# Altium PCB board.PcbDoc
Units mil, origin at the board's own origin, x right, y up, seen from the top; angles counter-clockwise.
Board outline 8000 x 8000 mil, 4 copper layers (LV, SIGPour, VOLTPour, HV), stack 23.756 mil thick; 121 components, 25 nets, 193 pads, 72 vias.
Unrouted connection lines stored in the file: 122.
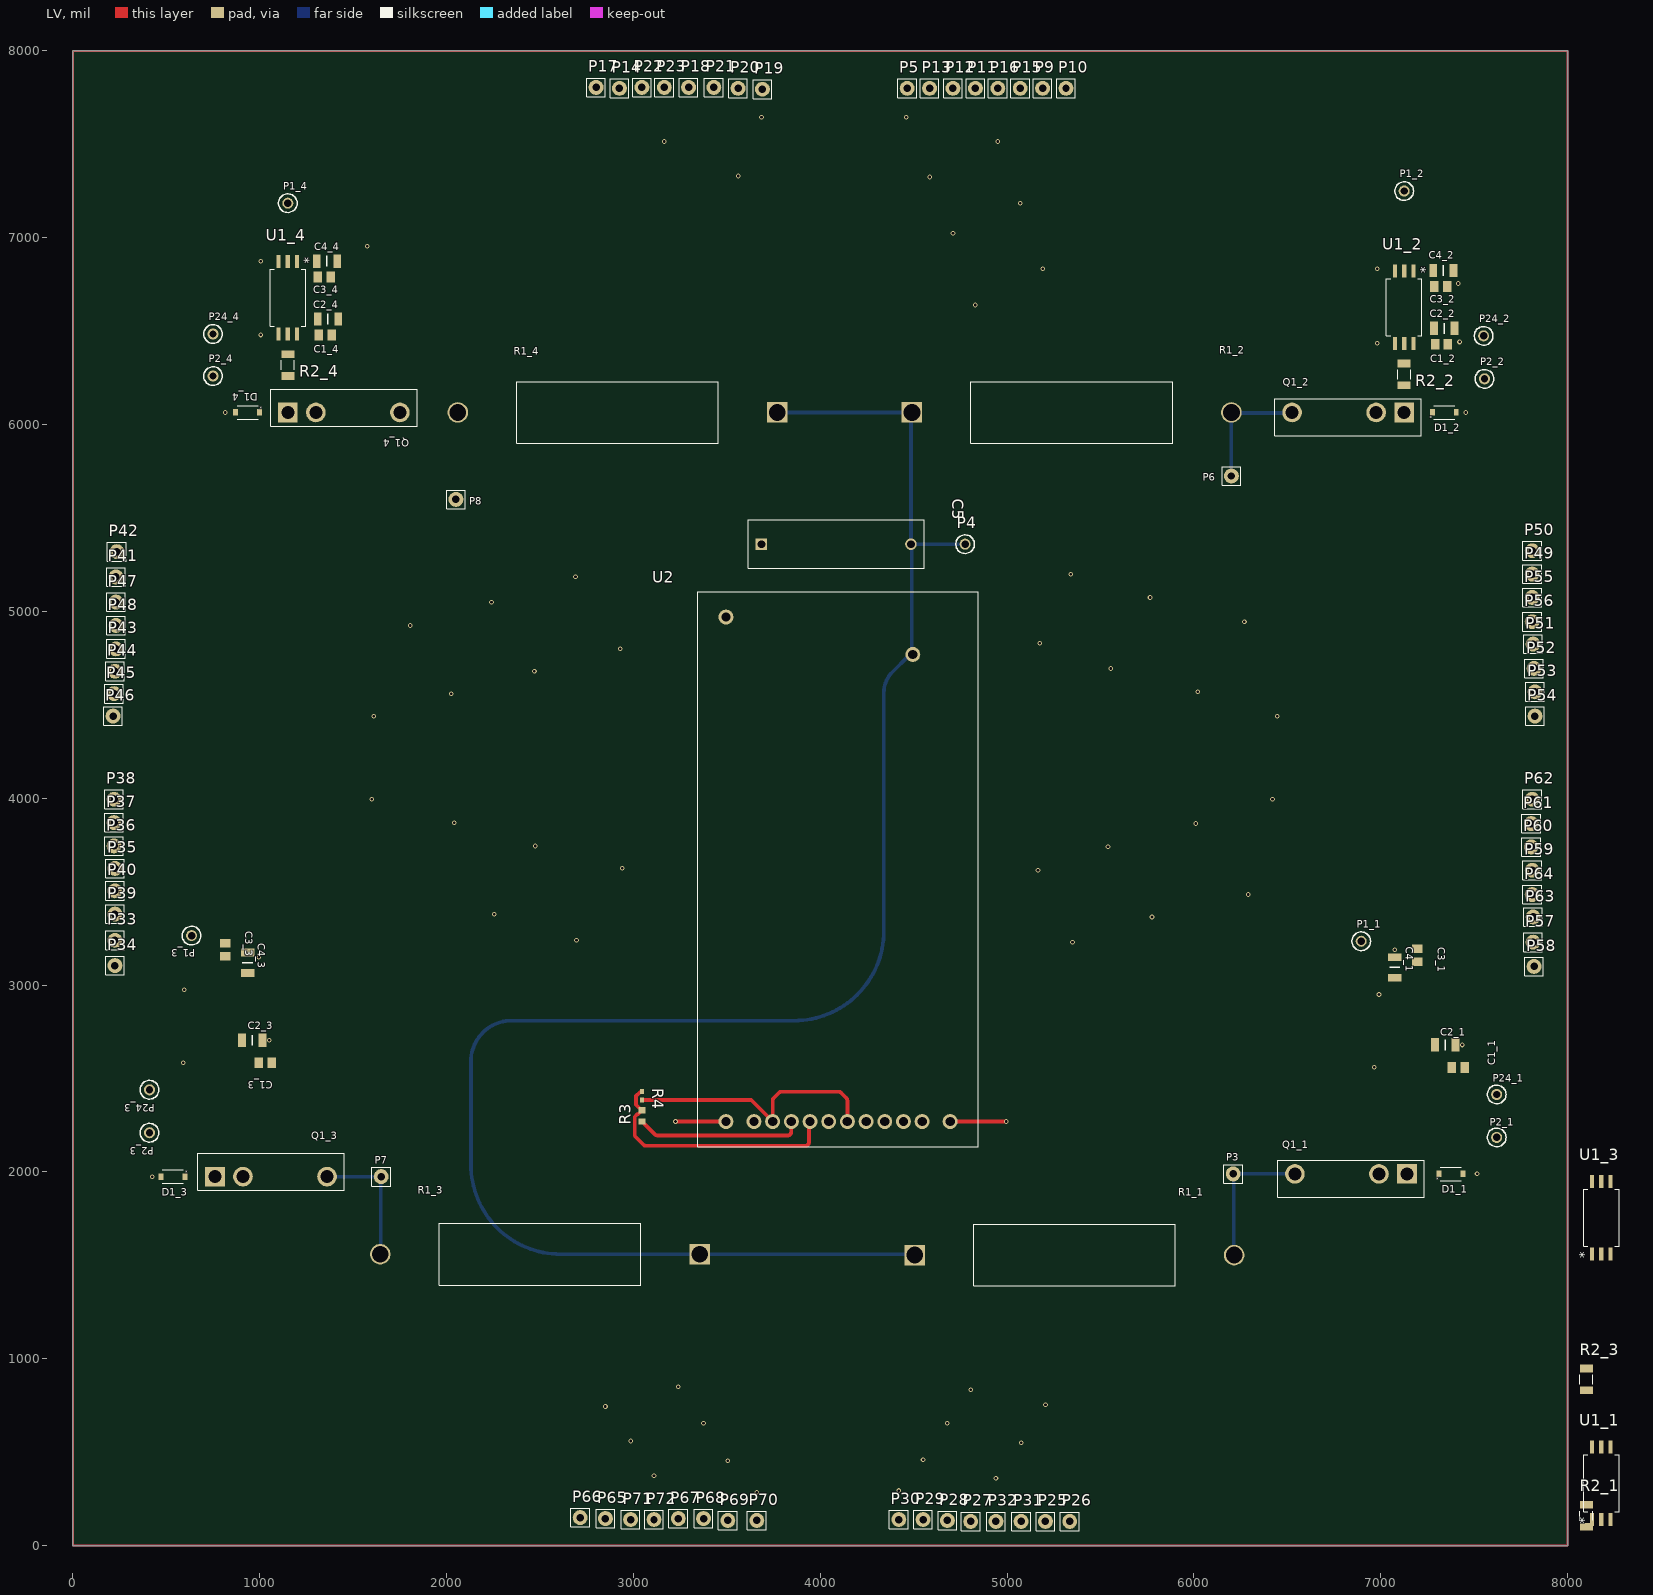
[diagram p0: LV view]
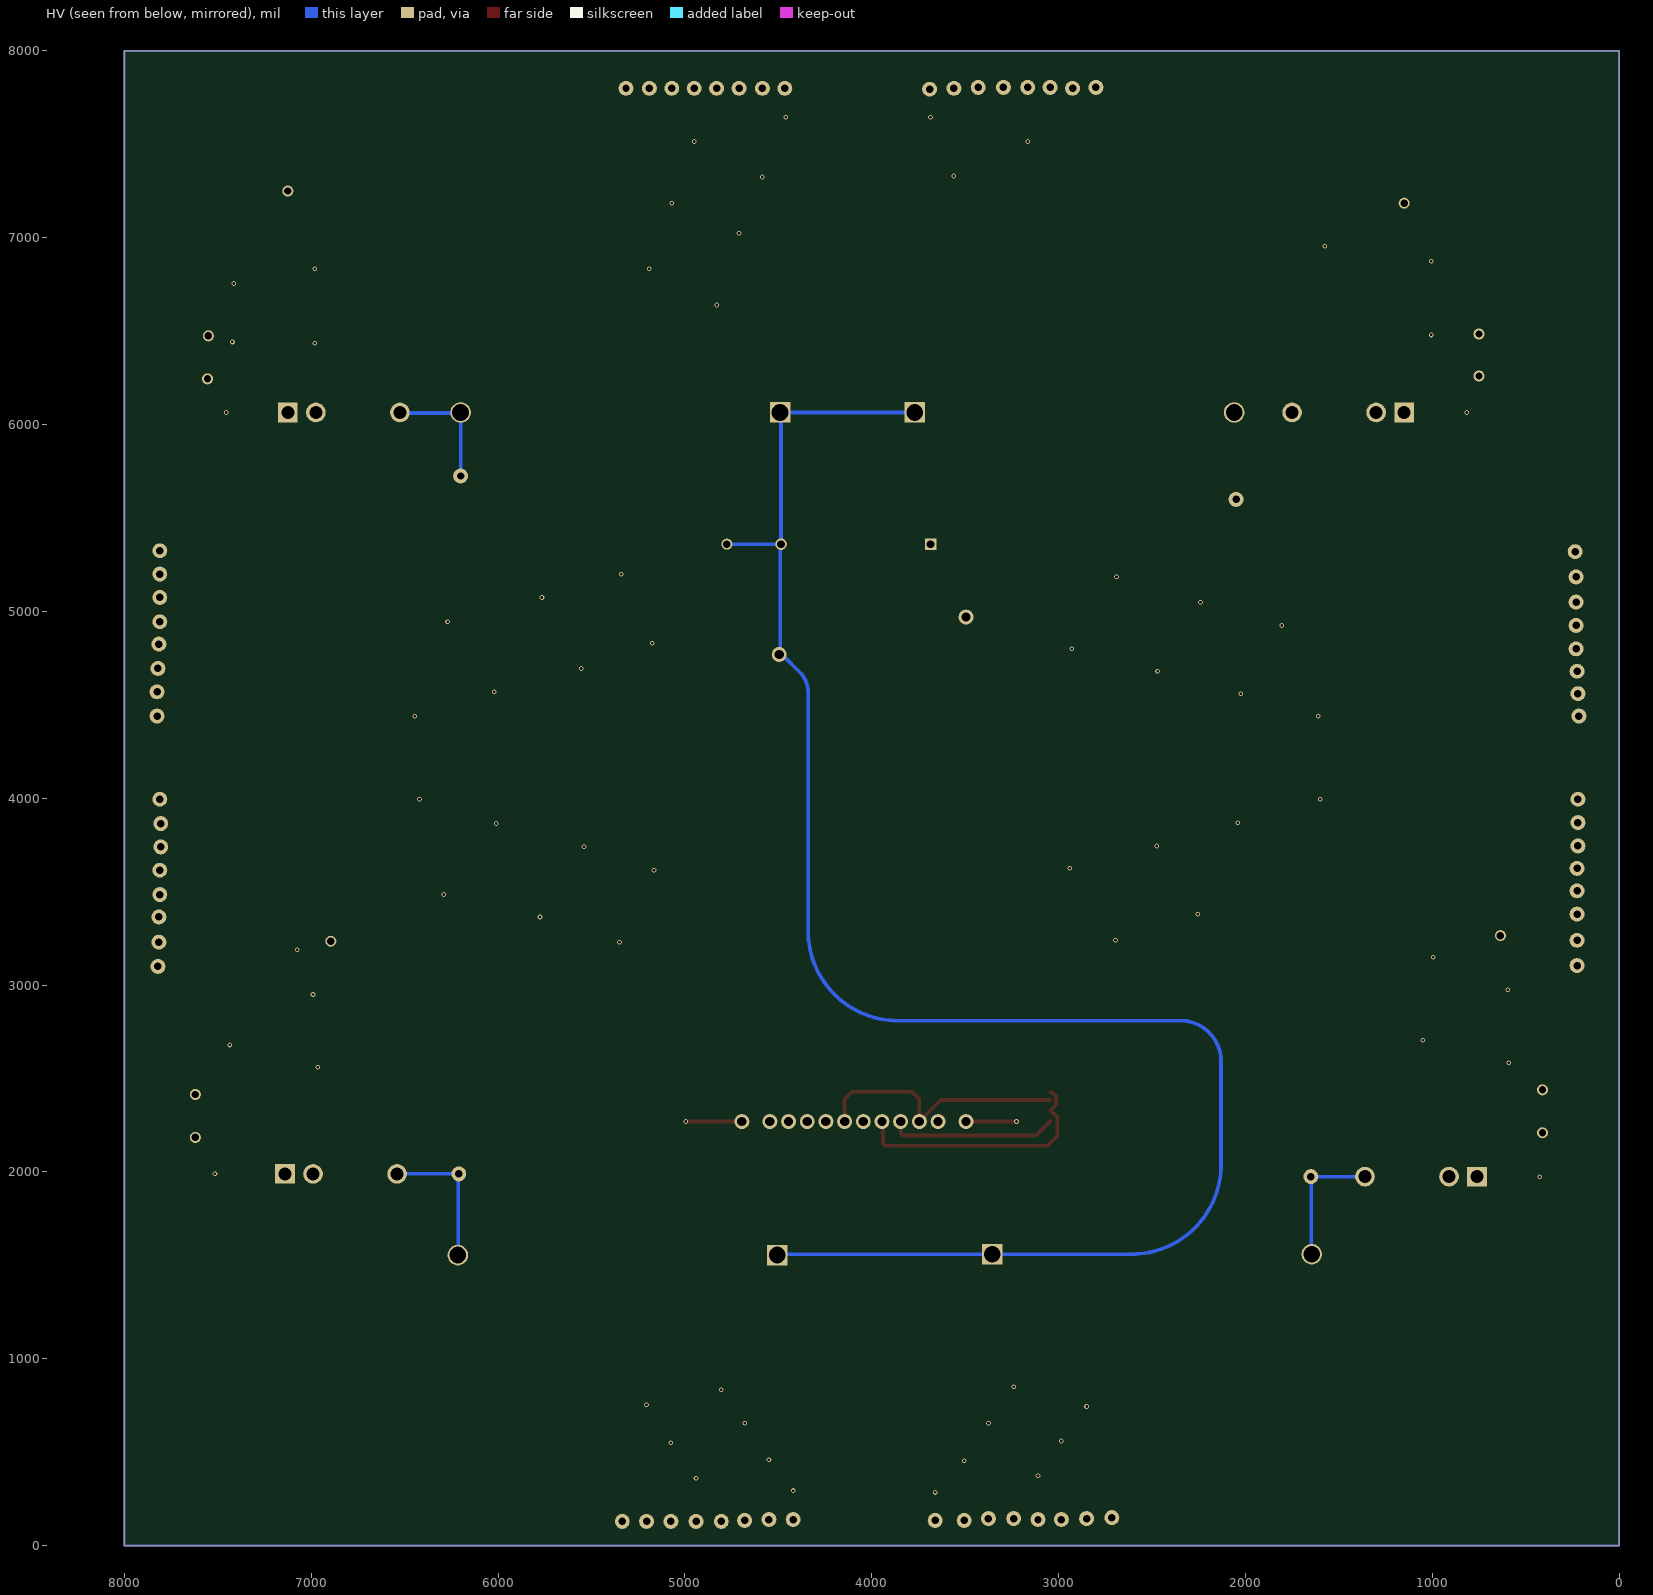
[diagram p1: HV view, seen from below]
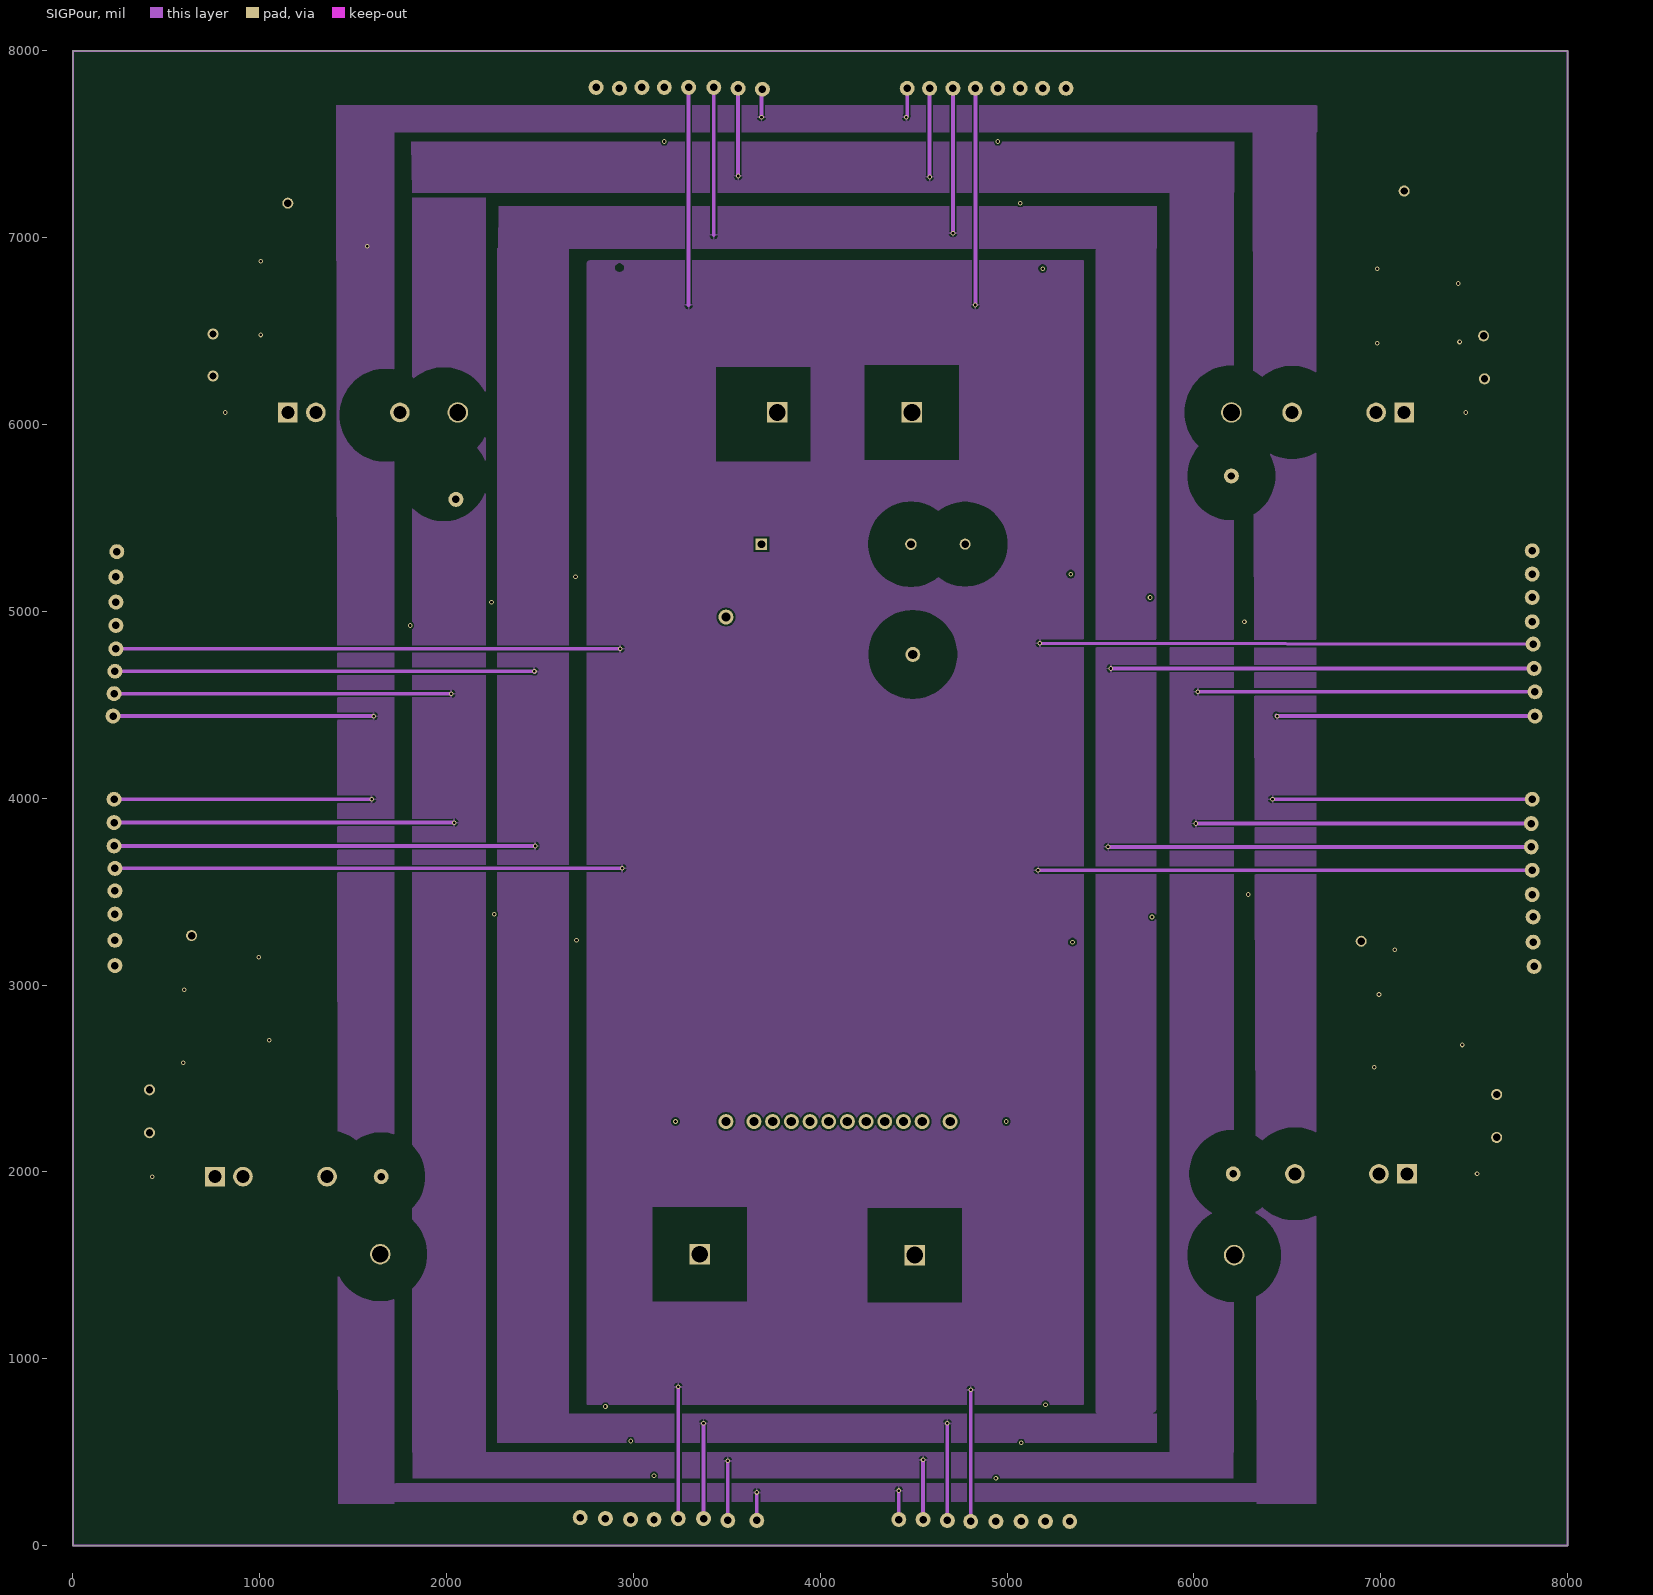
[diagram p2: SIGPour]
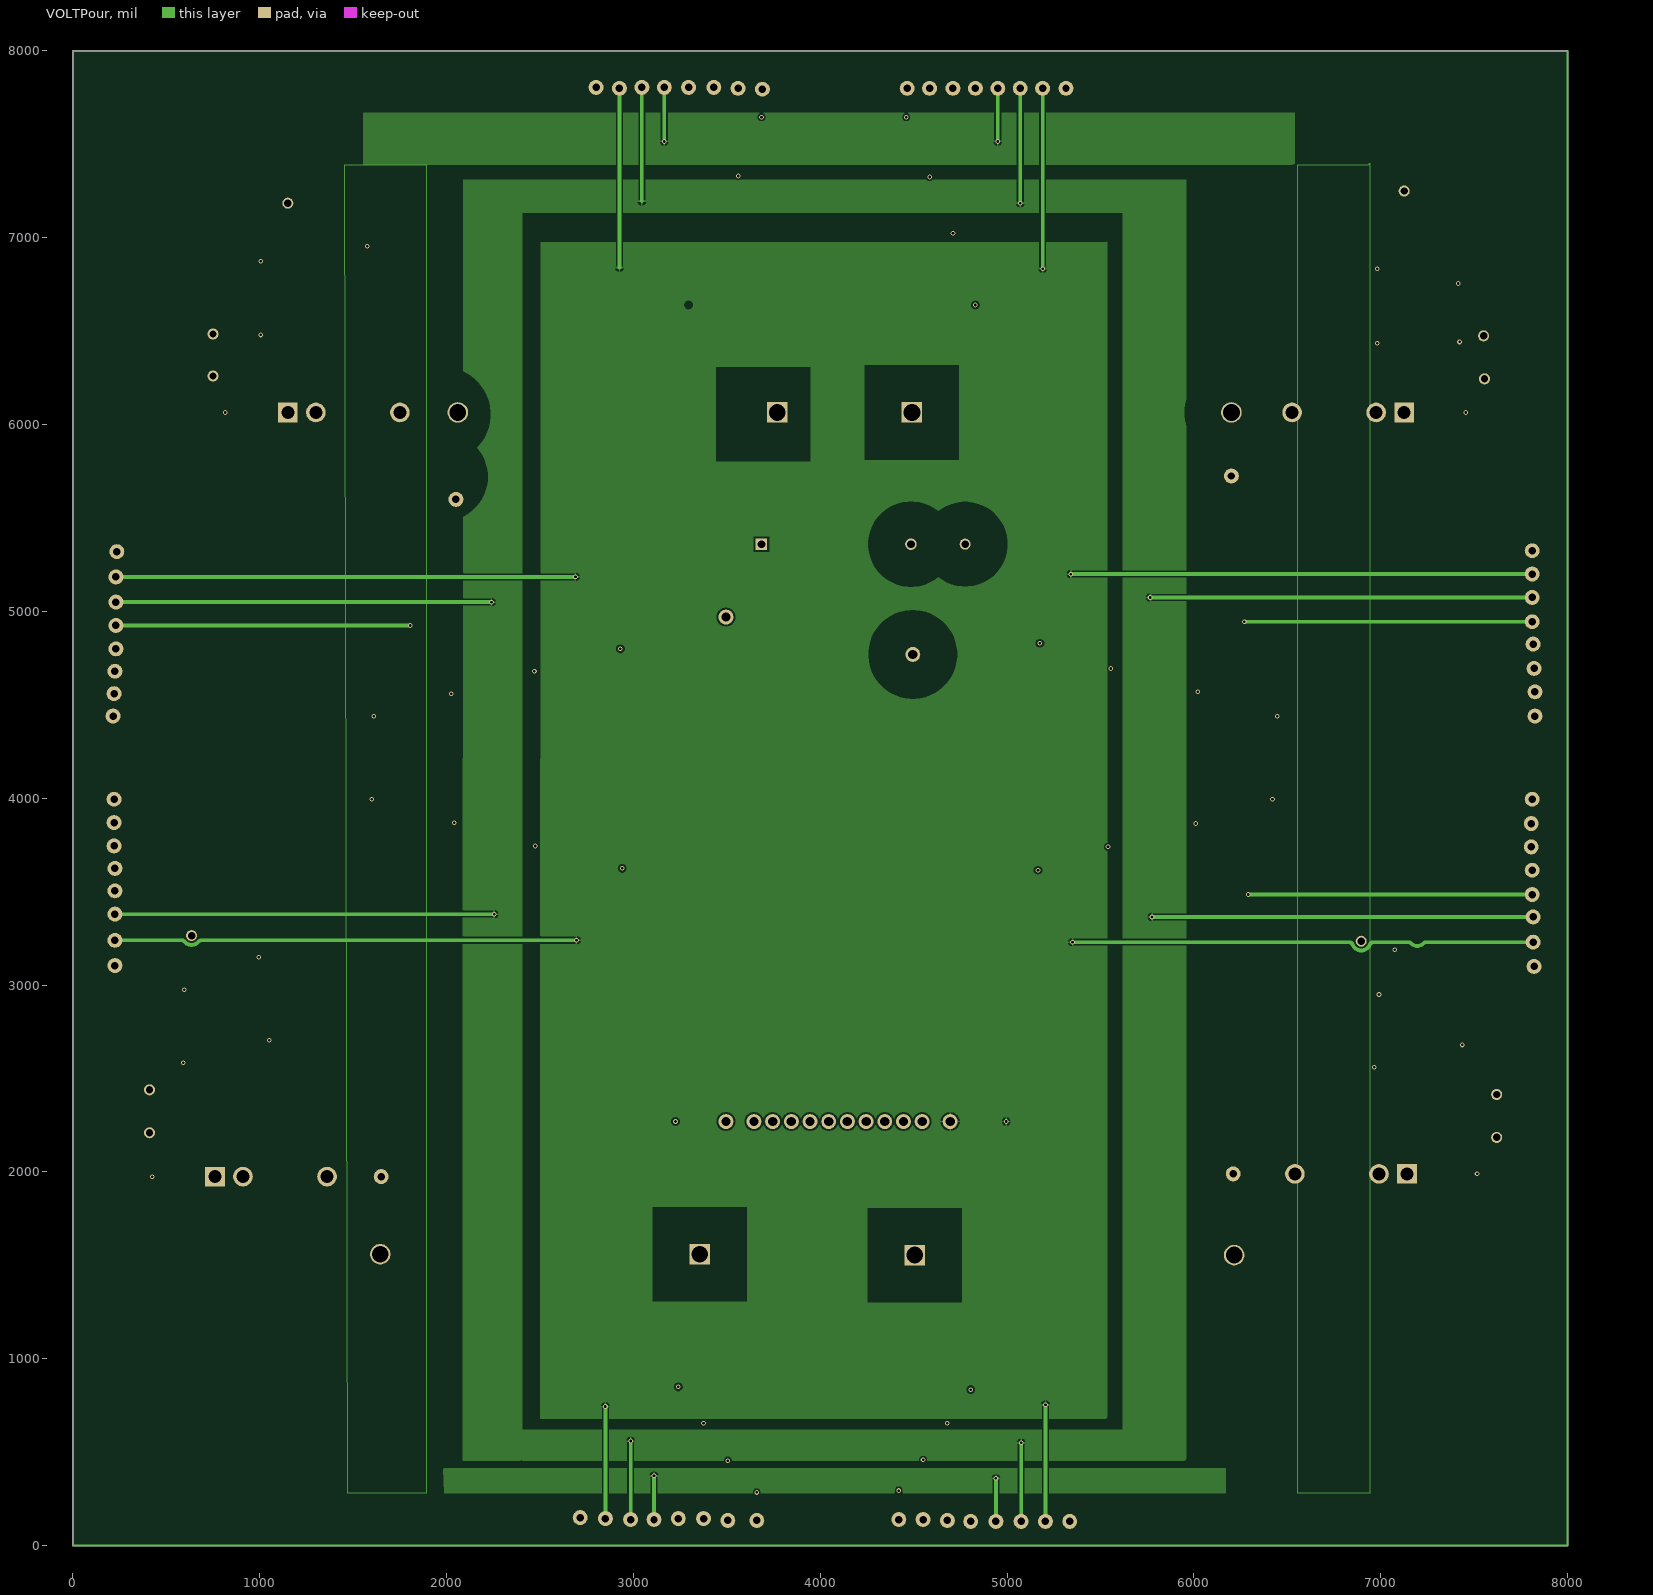
[diagram p3: VOLTPour]

## Layer stack, top to bottom
Top Solder: solder mask 0.4, Solder Resist, Dk 3.5
LV: signal copper 1.4
Dielectric 2: prepreg 2.8, PP-006, Dk 4.1
SIGPour: signal copper 1.378
Dielectric 1: dielectric 12.6, FR-4, Dk 4.8
VOLTPour: signal copper 1.378
Dielectric 3: prepreg 2.8, PP-006, Dk 4.1
HV: signal copper 1.4
Bottom Solder: solder mask 0.4, Solder Resist, Dk 3.5

## Board outline
0,0 8000,0 8000,8000 0,8000

## Design rules (kind name [scope] priority, off if disabled: settings)
Clearance "Schematic Clearance Constraint_4" [InNet('3kV')] p1: gap=196.85 ignorepadtopadclearanceinfootprint=TRUE except(0: Arc-Hole Track-Hole SMDPad-Hole THPad-Hole Via-Hole Fill-Hole Poly-Hole Region-Hole Text-Hole; 10: Arc-Text Track-Text SMDPad-Text THPad-Text Via-Text Fill-Text Poly-Text Region-Text Text-Text)
Clearance "Schematic Clearance Constraint_3" [InNet('HVSIG3')] p2: gap=196.85 ignorepadtopadclearanceinfootprint=TRUE except(0: Arc-Hole Track-Hole SMDPad-Hole THPad-Hole Via-Hole Fill-Hole Poly-Hole Region-Hole Text-Hole; 10: Arc-Text Track-Text SMDPad-Text THPad-Text Via-Text Fill-Text Poly-Text Region-Text Text-Text)
Clearance "Schematic Clearance Constraint_2" [InNet('HVSIG1')] p3: gap=196.85 ignorepadtopadclearanceinfootprint=TRUE except(0: Arc-Hole Track-Hole SMDPad-Hole THPad-Hole Via-Hole Fill-Hole Poly-Hole Region-Hole Text-Hole; 10: Arc-Text Track-Text SMDPad-Text THPad-Text Via-Text Fill-Text Poly-Text Region-Text Text-Text)
Clearance "Schematic Clearance Constraint_1" [InNet('HVSIG4')] p4: gap=196.85 ignorepadtopadclearanceinfootprint=TRUE except(0: Arc-Hole Track-Hole SMDPad-Hole THPad-Hole Via-Hole Fill-Hole Poly-Hole Region-Hole Text-Hole; 10: Arc-Text Track-Text SMDPad-Text THPad-Text Via-Text Fill-Text Poly-Text Region-Text Text-Text)
Clearance "Schematic Clearance Constraint" [InNet('HVSIG2')] p5: gap=196.85 ignorepadtopadclearanceinfootprint=TRUE except(0: Arc-Hole Track-Hole SMDPad-Hole THPad-Hole Via-Hole Fill-Hole Poly-Hole Region-Hole Text-Hole; 10: Arc-Text Track-Text SMDPad-Text THPad-Text Via-Text Fill-Text Poly-Text Region-Text Text-Text)
Clearance [All] p6: gap=10 ignorepadtopadclearanceinfootprint=FALSE except(0: Arc-Hole Track-Hole SMDPad-Hole THPad-Hole Via-Hole Fill-Hole Poly-Hole Region-Hole Text-Hole)
Height [All] p1 off: minheight=0 maxheight=1000 prefheight=500
PolygonConnect [All] p1: connectstyle=Relief reliefconductorwidth=10 reliefentries=4 polygonreliefangle="90 Angle" airgapwidth=10
RoomDefinition U4_power [InComponentClass('U4_power')] p1: confinementstyle=ConfineIn formatcopy=TRUE lockcomponents=FALSE outline 3965,7315 645,7315 645,5770 3965,5770
RoomDefinition top [InComponentClass('top')] p2: confinementstyle=ConfineIn formatcopy=TRUE lockcomponents=FALSE outline 0,0 7999.72,0 7999.72,8000 0,8000
RoomDefinition U3_power [InComponentClass('U3_power')] p3: confinementstyle=ConfineIn formatcopy=TRUE lockcomponents=FALSE outline 3770,3425 190,3425 190,814.56 3770,814.56
RoomDefinition U2_power [InComponentClass('U2_power')] p4: confinementstyle=ConfineIn formatcopy=TRUE lockcomponents=FALSE outline 4300,5770 7620,5770 7620,7315 4300,7315
RoomDefinition U1_power [InComponentClass('U1_power')] p5: confinementstyle=ConfineIn formatcopy=TRUE lockcomponents=FALSE outline 4230,815 7830,815 7830,3395 4230,3395
RoutingVias [All] p1: holewidth=28 width=50 viastyle="Through Hole" minholewidth=28 minwidth=50 maxholewidth=28 maxwidth=50
SolderMaskExpansion [All] p1: expansion=4 istentingtop=FALSE
Width [All] p1 off: maxlimit=10 minlimit=10 preferedwidth=10
29 further rules are at their usual default settings.

## Classes and differential pairs
channel class connector: U1_connector U2_connector U3_connector U4_connector U5_connector U6_connector U7_connector U8_connector
channel class power: U1_power U2_power U3_power U4_power
component class U4_power: C1_4 C2_4 C3_4 C4_4 D1_4 P1_4 P2_4 P24_4 Q1_4 R1_4 R2_4 U1_4
component class U3_power: C1_3 C2_3 C3_3 C4_3 D1_3 P1_3 P2_3 P24_3 Q1_3 R1_3 R2_3 U1_3
component class U2_power: C1_2 C2_2 C3_2 C4_2 D1_2 P1_2 P2_2 P24_2 Q1_2 R1_2 R2_2 U1_2
component class U1_power: C1_1 C2_1 C3_1 C4_1 D1_1 P1_1 P2_1 P24_1 Q1_1 R1_1 R2_1 U1_1
component class top: C5 P3 P4 P5 P6 P7 P8 P9 P10 P11 P12 P13 P14 P15 P16 P17 P18 P19 P20 P21 P22 P23 P25 P26 P27 P28 P29 P30 P31 P32 P33 P34 P35 P36 P37 P38 P39 P40 P41 P42 P43 P44 P45 P46 P47 P48 P49 P50 P51 P52 P53 P54 P55 P56 P57 P58 P59 P60 P61 P62 P63 P64 P65 P66 P67 P68 P69 P70 P71 P72 R3 R4 U2

## Components (designator, comment, footprint, x,y, rotation, side; value= is the part's Value field where it differs from the comment)
C1_1 "Capacitor" "0.1uF Cer SMD" 7415,2560 r180 top (schematic designator C1)
C1_2 "Capacitor" "0.1uF Cer SMD" 7324.65,6430 r180 top (schematic designator C1)
C1_3 "Capacitor" "0.1uF Cer SMD" 1030,2585 r180 top (schematic designator C1)
C1_4 "Capacitor" "0.1uF Cer SMD" 1349.65,6480 r180 top (schematic designator C1)
C2_1 "10u" "10uF Cer SMD" 7345,2680 r180 top (schematic designator C2)
C2_2 "10u" "10uF Cer SMD" 7339.72,6515 r180 top (schematic designator C2)
C2_3 "10u" "10uF Cer SMD" 960,2705 r180 top (schematic designator C2)
C2_4 "10u" "10uF Cer SMD" 1364.72,6565 r180 top (schematic designator C2)
C3_1 "Capacitor" "0.1uF Cer SMD" 7195,3160 r270 top (schematic designator C3)
C3_2 "Capacitor" "0.1uF Cer SMD" 7319.65,6740 r180 top (schematic designator C3)
C3_3 "Capacitor" "0.1uF Cer SMD" 815,3190 r270 top (schematic designator C3)
C3_4 "Capacitor" "0.1uF Cer SMD" 1344.65,6790 r180 top (schematic designator C3)
C4_1 "10u" "10uF Cer SMD" 7075,3095 r270 top (schematic designator C4)
C4_2 "10u" "10uF Cer SMD" 7334.72,6825 r180 top (schematic designator C4)
C4_3 "10u" "10uF Cer SMD" 935,3120 r270 top (schematic designator C4)
C4_4 "10u" "10uF Cer SMD" 1359.72,6875 r180 top (schematic designator C4)
C5 "Capacitor" "HV CAPACITOR" 3685,5360 r0 top
D1_1 "Zener Diode" "ZENER DIODE" 7375,1990 r0 top (schematic designator D1)
D1_2 "Zener Diode" "ZENER DIODE" 7340,6065 r0 top (schematic designator D1)
D1_3 "Zener Diode" "ZENER DIODE" 535,1975 r180 top (schematic designator D1)
D1_4 "Zener Diode" "ZENER DIODE" 935,6065 r180 top (schematic designator D1)
P1_1 "5003" KSTN-5003 6895,3235 r90 top (schematic designator P1)
P1_2 "5003" KSTN-5003 7125,7250 r90 top (schematic designator P1)
P1_3 "5003" KSTN-5003 635,3265 r270 top (schematic designator P1)
P1_4 "5003" KSTN-5003 1150,7185 r90 top (schematic designator P1)
P2_1 "5003" KSTN-5003 7620,2185 r90 top (schematic designator P2)
P2_2 "5003" KSTN-5003 7555,6245 r90 top (schematic designator P2)
P2_3 "5003" KSTN-5003 410,2210 r270 top (schematic designator P2)
P2_4 "5003" KSTN-5003 750,6260 r90 top (schematic designator P2)
P3 "Output Point" VIA 6210,1990 r0 top
P4 "5003" KSTN-5003 4775,5360 r0 top
P5 "Output Point" VIA 4465,7800 r0 top
P6 "Output Point" VIA 6200,5725 r0 top
P7 "Output Point" VIA 1650,1975 r0 top
P8 "Output Point" VIA 2050,5600 r0 top
P9 "Output Point" VIA 5190,7800 r0 top
P10 "Output Point" VIA 5315,7800 r0 top
P11 "Output Point" VIA 4830,7800 r0 top
P12 "Output Point" VIA 4710,7800 r0 top
P13 "Output Point" VIA 4585,7800 r0 top
P14 "Output Point" VIA 2925,7800 r0 top
P15 "Output Point" VIA 5070,7800 r0 top
P16 "Output Point" VIA 4950,7800 r0 top
P17 "Output Point" VIA 2800,7805 r0 top
P18 "Output Point" VIA 3295,7805 r0 top
P19 "Output Point" VIA 3690,7795 r0 top
P20 "Output Point" VIA 3560,7800 r0 top
P21 "Output Point" VIA 3430,7805 r0 top
P22 "Output Point" VIA 3045,7805 r0 top
P23 "Output Point" VIA 3165,7805 r0 top
P24_1 "5003" KSTN-5003 7620,2415 r90 top (schematic designator P24)
P24_2 "5003" KSTN-5003 7550,6475 r90 top (schematic designator P24)
P24_3 "5003" KSTN-5003 410,2440 r270 top (schematic designator P24)
P24_4 "5003" KSTN-5003 750,6485 r90 top (schematic designator P24)
P25 "Output Point" VIA 5205,130 r0 top
P26 "Output Point" VIA 5335,130 r0 top
P27 "Output Point" VIA 4805,130 r0 top
P28 "Output Point" VIA 4680,135 r0 top
P29 "Output Point" VIA 4550,140 r0 top
P30 "Output Point" VIA 4420,140 r0 top
P31 "Output Point" VIA 5075,130 r0 top
P32 "Output Point" VIA 4940,130 r0 top
P33 "Output Point" VIA 225,3240 r0 top
P34 "Output Point" VIA 225,3105 r0 top
P35 "Output Point" VIA 225,3625 r0 top
P36 "Output Point" VIA 220,3745 r0 top
P37 "Output Point" VIA 220,3870 r0 top
P38 "Output Point" VIA 220,3995 r0 top
P39 "Output Point" VIA 225,3380 r0 top
P40 "Output Point" VIA 225,3505 r0 top
P41 "Output Point" VIA 230,5185 r0 top
P42 "Output Point" VIA 235,5320 r0 top
P43 "Output Point" VIA 230,4800 r0 top
P44 "Output Point" VIA 225,4680 r0 top
P45 "Output Point" VIA 220,4560 r0 top
P46 "Output Point" VIA 215,4440 r0 top
P47 "Output Point" VIA 230,5050 r0 top
P48 "Output Point" VIA 230,4925 r0 top
P49 "Output Point" VIA 7810,5200 r0 top
P50 "Output Point" VIA 7810,5325 r0 top
P51 "Output Point" VIA 7815,4825 r0 top
P52 "Output Point" VIA 7820,4695 r0 top
P53 "Output Point" VIA 7825,4570 r0 top
P54 "Output Point" VIA 7825,4440 r0 top
P55 "Output Point" VIA 7810,5075 r0 top
P56 "Output Point" VIA 7810,4945 r0 top
P57 "Output Point" VIA 7815,3230 r0 top
P58 "Output Point" VIA 7820,3100 r0 top
P59 "Output Point" VIA 7810,3615 r0 top
P60 "Output Point" VIA 7805,3740 r0 top
P61 "Output Point" VIA 7805,3865 r0 top
P62 "Output Point" VIA 7810,3995 r0 top
P63 "Output Point" VIA 7815,3365 r0 top
P64 "Output Point" VIA 7810,3485 r0 top
P65 "Output Point" VIA 2850,145 r0 top
P66 "Output Point" VIA 2715,150 r0 top
P67 "Output Point" VIA 3240,145 r0 top
P68 "Output Point" VIA 3375,145 r0 top
P69 "Output Point" VIA 3505,135 r0 top
P70 "Output Point" VIA 3660,135 r0 top
P71 "Output Point" VIA 2985,140 r0 top
P72 "Output Point" VIA 3110,140 r0 top
Q1_1 "IXTL2N450" MOSFET 7140,1990 r180 top (schematic designator Q1)
Q1_2 "IXTL2N450" MOSFET 7125,6065 r180 top (schematic designator Q1)
Q1_3 "IXTL2N450" MOSFET 760,1975 r0 top (schematic designator Q1)
Q1_4 "IXTL2N450" MOSFET 1150,6065 r0 top (schematic designator Q1)
R1_1 "Resistor" "10M Ohm" 4505,1555 r0 top (schematic designator R1)
R1_2 "Resistor" "10M Ohm" 4490,6065 r0 top (schematic designator R1)
R1_3 "Resistor" "10M Ohm" 3355,1560 r180 top (schematic designator R1)
R1_4 "Resistor" "10M Ohm" 3770,6065 r180 top (schematic designator R1)
R2_1 "4.99" "4.99 Ohm" 8100,160 r90 top (schematic designator R2)
R2_2 "4.99" "4.99 Ohm" 7125,6268.46 r90 top (schematic designator R2)
R2_3 "4.99" "4.99 Ohm" 8100,890 r90 top (schematic designator R2)
R2_4 "4.99" "4.99 Ohm" 1150,6318.46 r90 top (schematic designator R2)
R3 "330" "330 OHM" 3045,2300 r90 top
R4 "180" "180 OHM" 3045,2407.5 r270 top
U1_1 "ADuM4120" "Gate Driver" 8180,335 r90 top (schematic designator U1)
U1_2 "ADuM4120" "Gate Driver" 7125,6629.13 r270 top (schematic designator U1)
U1_3 "ADuM4120" "Gate Driver" 8180,1755 r90 top (schematic designator U1)
U1_4 "ADuM4120" "Gate Driver" 1150,6679.13 r270 top (schematic designator U1)
U2 "Step Up Converter" "STEP UP CONVERTER" 4638.7,2255.43 r90 top

## Footprints (in the part's own frame and the unit in brackets; to place one, negate y for a bottom-side part, rotate by r counter-clockwise, add the part's x,y. Pads: shape width x height; smd on the part's side, far side on the other; paste and mask are expansions set on the pad)
"0.1uF Cer SMD" [mm] "CAPC2012X94N"
  rect 1.16x1.47 smd: 1(-0.88,0) 2(0.88,0)
  body extent -1,-0.63 1,0.63, height 0.94
"4.99 Ohm" [mm] "RESC3116X65N"
  rect 1.05x1.77 smd: 1(-1.485,0) 2(1.485,0)
  silkscreen extent -0.64,-0.88 0.64,0.88, body extent -1.6,-0.8 1.6,0.8, height 0.65
"10M Ohm" [mil] "OH_MOX910_OHM"
  rect 110x110 hole 90 mask+0: 1(0,0)
  round 110 hole 90 mask+0: 2(1710,0)
  silkscreen extent 315,-165 1395,165, body extent 0,0 10,10, height 10
"10uF Cer SMD" [mm] "CAPC3216X180N"
  rect 1.05x1.82 smd: 1(-1.39,0) 2(1.39,0)
  silkscreen extent 0,-0.7 0,0.7, body extent -1.6,-0.8 1.6,0.8, height 1.8
"180 OHM" [mil] "RES_RK73H1E_KOA"
  rect 26x22 smd paste+0 mask+0: 1(-22.5,0) 2(22.5,0)
  body extent 0,0 10,10, height 10
"330 OHM" [mm] "RESC1508X55N"
  rect 0.87x0.93 smd: 1(-0.755,0) 2(0.755,0)
"Gate Driver" [mil] "ADuM4120"
  rect 69.53x22.08 smd paste+0 mask+0: 1(-194.13,50) 2(-194.13,0) 3(-194.13,-50) 4(194.13,-50) 5(194.13,0) 6(194.13,50)
  silkscreen extent -153,-95 153,95, body extent 0,0 10,10, height 10
"HV CAPACITOR" [mil] "SV17_AVX"
  rect 62x62 hole 42 mask+0: 1(0,0)
  round 62 hole 42 mask+0: 2(800,0)
  silkscreen extent -70,-130 870,130, body extent 0,0 10,10, height 10
KSTN-5003 [mm] "Test Point, Through Hole, Dia 2.54mm"
  round 1.5 hole 1: 1(0,0)
  silkscreen extent -1.27,-1.27 1.27,1.27, body extent -1.27,-1.27 1.27,1.27, height 4.57
MOSFET [mm]
  rect 2.67x2.67 hole 1.78: 1(0,0)
  round 2.67 hole 1.78: 2(3.81,0) 3(15.24,0)
  silkscreen extent -2.34,-1.85 17.58,3.17, body extent -2.34,-1.85 17.58,3.17, height 26.52
"STEP UP CONVERTER" [mil] "HRL30"
  round 80 hole 50: 1(14.57,1143.7) 2(14.57,993.7) 3(14.57,893.7) 4(14.57,793.7) 5(14.57,693.7) 6(14.57,593.7) 7(14.57,493.7) 8(14.57,393.7) 9(14.57,293.7) 10(14.57,193.7) 11(14.57,93.7) 12(14.57,-56.3) 13(2514.57,143.7) 14(2714.57,1143.7)
  silkscreen extent -120,-206 2850,1294
VIA [mil]
  round 80 hole 40: 1(0,0)
  silkscreen extent -50,-50 50,50
"ZENER DIODE" [mil] "KDZVTR16B"
  rect 26x35 smd paste+0 mask+0: 1(-64,0) 2(64,0)
  silkscreen extent -56,-36 56,36, body extent 0,0 10,10, height 10

## Part data
C2_1 C2_2 C2_3 C2_4 C4_1 C4_2 C4_3 C4_4: library part Capacitor
D1_1 D1_2 D1_3 D1_4: "KDZVTR16B", Built_By=EMA_Matt, Copyright="Copyright (C) 2018 Accelerated Designs. All rights reserved", Manufacturer_Part_Number=KDZVTR16B, RefDes=RefDes, SourceLibrary=Rohm_2019-09-23, Type=DEV, Vendor="ROHM Semiconductor"
P1_1 P1_2 P1_3 P1_4 P2_1 P2_2 P2_3 P2_4 P4 P24_1 P24_2 P24_3 P24_4: library part CMP-002-00037-2, "Test Point, Orange, Height 4.6 mm, Tail Length 3 mm, 1-Pin THD, RoHS", Colour=Orange, Manufacturer=Keystone, Package Description="1-Pin Through Hole Device, Dia 2.54 mm", Package Quantity=10, Case/Package=5003, Connector Type=TestPoint, Contact Material=Bronze, Contact Plating=Tin, Datasheet URL=http://keyelco.com/userAssets/file/M65p56.pdf, Datasheet Version=Jun-15, Diameter=2.54mm, Manufacturer URL=http://www.keyelco.com/, Mounting Technology=TH, Package Reference=5003, Packaging=Bulk, Pins=1, RoHS Compliant=True
P3 P5 P6 P7 P8 P9 P10 P11 P12 P13 P14 P15 P16 P17 P18 P19 P20 P21 P22 P23 P25 P26 P27 P28 P29 P30 P31 P32 P33 P34 P35 P36 P37 P38 P39 P40 P41 P42 P43 P44 P45 P46 P47 P48 P49 P50 P51 P52 P53 P54 P55 P56 P57 P58 P59 P60 P61 P62 P63 P64 P65 P66 P67 P68 P69 P70 P71 P72: "Thru hole via"
Q1_1 Q1_2 Q1_3 Q1_4: library part MOSFET, "IXTL2N4X0"
R2_1 R2_2 R2_3 R2_4 R3 R4: library part Resistor
U1_1 U1_2 U1_3 U1_4: library part "Gate Driver"
U2: "HRL30"

## Via types
v1: diameter 25, hole 14, LV to HV, 72 vias

## Nets (pads, with @x,y where several pads share a name; then routed paths per layer and width w, separated by ;. In a path a pad name is that pad's centre, name@x,y a point inside that pad or via, vN(x,y) a via of type N, cw(c..) or ccw(c..) an arc to the next point about the centre after c; other vN are vias at no path point)
3kV: C5.2 P4.1 R1_1.1 R1_2.1 R1_3.1 R1_4.1 U2.13 | length 9660.7
  HV w20: R1_4.1 R1_2.1 ; R1_2.1@4485,6060 C5.2 ; U2.13@4494.99,4769.93 ccw(c4492.44,4740.1) 4471.38,4761.38 ccw(c4492.44,4740.1) 4471.33,4761.33 4385,4675 ccw(c4495.09,4565.76) 4340,4566.22 4340,4566.16 cw(c4320,4566.07) 4340,4566.07 4340,3290 cw(c3860,3290) 3860,2810 2348.12,2810 ccw(c2347.91,2592.09) 2130,2592.04 2130,2040 ccw(c2610,2040) 2610,1560 R1_3.1 4500,1560 R1_1.1 ; U2.13 4490,4775 4490,5355 C5.2 ; P4.1 C5.2
5V_OUT_1: C3_1.2 C3_2.2 C3_3.2 C3_4.2 C4_1.2 C4_2.2 C4_3.2 C4_4.2 P16.1 P23.1 P32.1 P40.1 P48.1 P56.1 P64.1 P72.1 U1_1.1 U1_2.1 U1_3.1 U1_4.1 | length 5675
  VOLTPour w20: P48.1 v1(1805,4925) ; P72.1 v1(3110,375) ; v1(3165,7515) P23.1 ; P32.1 v1(4940,360) ; v1(4950,7515) P16.1 ; v1(6270,4945) P56.1 ; v1(6290,3485) P64.1
  other v1: 1575,6955
10V_OUT_1: C1_1.2 C1_2.2 C1_3.2 C1_4.2 C2_1.2 C2_2.2 C2_3.2 C2_4.2 P15.1 P22.1 P31.1 P39.1 P47.1 P55.1 P63.1 P71.1 U1_1.6 U1_2.6 U1_3.6 U1_4.6 | length 10190
  VOLTPour w20: P39.1 v1(2255,3380) ; P47.1 v1(2240,5050) ; P71.1 v1(2985,560) ; 3045,7195 P22.1 ; v1(5070,7185) P15.1 ; P31.1 v1(5075,550) ; v1(5765,5075) P55.1 ; v1(5775,3365) P63.1
28V_OUT_1: P9.1 P14.1 P25.1 P33.1 P41.1 P49.1 P57.1 P65.1 U2.12 | length 13377.6
  LV w20: U2.12 v1(4995,2270)
  VOLTPour w20: P33.1 582.06,3240 cw(c582,3220) 597.22,3232.97 ccw(c635,3265) 672.79,3232.99 cw(c688,3220) 687.94,3240 v1(2695,3240) ; P41.1 v1(2690,5185) ; P65.1 v1(2850,745) ; 2925,6840 P14.1 ; v1(5190,6835) P9.1 ; P25.1 v1(5205,755) ; v1(5340,5200) P49.1 ; v1(5350,3230) 6830.19,3230 cw(c6830.12,3210) 6848.77,3217.24 ccw(c6895,3235) 6941.24,3217.26 cw(c6959.88,3210) 6959.81,3230 7146.07,3230 cw(c7146.01,3210) 7159.97,3224.32 ccw(c7195,3260) 7230.04,3224.33 cw(c7243.99,3210) 7243.93,3230 P57.1
GND: C1_1.1 C1_2.1 C1_3.1 C1_4.1 C2_1.1 C2_2.1 C2_3.1 C2_4.1 C3_1.1 C3_2.1 C3_3.1 C3_4.1 C4_1.1 C4_2.1 C4_3.1 C4_4.1 C5.1 D1_1.2 D1_2.2 D1_3.2 D1_4.2 Q1_1.2 Q1_2.2 Q1_3.2 Q1_4.2 U1_1.3 U1_1.4 U1_2.3 U1_2.4 U1_3.3 U1_3.4 U1_4.3 U1_4.4 U2.1 U2.14 | length 270
  LV w20: v1(3225,2270) U2.1
  other v1: 425,1975 7515,1990 7435,2680 1050,2705 995,3150 7075,3190 7455,6065 7421.35,6442.5 7415,6755
GND_OUT_1: P10.1 P17.1 P26.1 P34.1 P42.1 P50.1 P58.1 P66.1
HVSIG1: P3.1 Q1_1.3 R1_1.2 | length 767.1
  HV w20: R1_1.2 6212.5,1557.5 6212.5,1987.5 P3.1 Q1_1.3
HVSIG2: P6.1 Q1_2.3 R1_2.2 | length 662.1
  HV w20: P6.1 R1_2.2 6202.5,6062.5 6517.5,6062.5 Q1_2.3@6520,6060
HVSIG3: P7.1 Q1_3.3 R1_3.2 | length 707.1
  HV w20: Q1_3.3 P7.1 1647.5,1972.5 1647.5,1562.5 R1_3.2
HVSIG4: P8.1 Q1_4.3 R1_4.2
NetD1_1_1: D1_1.1 P2_1.1 Q1_1.1 R2_1.1
NetD1_2_1: D1_2.1 P2_2.1 Q1_2.1 R2_2.1
NetD1_3_1: D1_3.1 P2_3.1 Q1_3.1 R2_3.1
NetD1_4_1: D1_4.1 P2_4.1 Q1_4.1 R2_4.1
NetP24_1_1: P24_1.1 R2_1.2 U1_1.5
NetP24_2_1: P24_2.1 R2_2.2 U1_2.5
NetP24_3_1: P24_3.1 R2_3.2 U1_3.5
NetP24_4_1: P24_4.1 R2_4.2 U1_4.5
NetR3_1: R3.1 U2.4 | length 895.6
  LV w20: R3.1@3046.18,2270.28 3115.6,2200.86 3115.64,2200.82 ccw(c3129.74,2215) 3129.74,2195 3825.06,2195 ccw(c3825,2215) 3845,2215 U2.4
NetR3_2: R3.2 R4.1 U2.5 | length 1352
  LV w20: R4.1@3044,2427 3034.72,2427 3014,2406.28 3014,2359.54 3043.82,2329.72 3022.55,2308.46 3019.46,2308.46 3006.69,2295.69 3006.69,2193.31 3054.14,2145.86 ; 3054.18,2145.82 ccw(c3068.28,2160) 3068.28,2140 3920.06,2140 ccw(c3920,2160) 3940,2160 U2.5@3940,2265
NetR4_2: R4.2 U2.3 U2.7 | length 1417.2
  LV w20: R4.2 3630,2385 U2.3 3745,2381.78 cw(c3765,2381.72) 3750.8,2395.8 3779.18,2424.18 cw(c3793.28,2410) 3793.22,2430 ; 3793.28,2430 4096.72,2430 cw(c4096.72,2410) 4110.8,2424.2 4139.18,2395.82 cw(c4125,2381.72) 4145,2381.78 ; U2.7 4145,2381.72
SIG1_OUT_1: P1_1.1 P11.1 P18.1 P27.1 P35.1 P43.1 P51.1 P59.1 P67.1 U1_1.2 | length 14425
  SIGPour w20: P35.1 v1@2935,3625 ; P43.1 v1(2930,4800) ; P67.1 v1@3240,845 ; 3295,6640 P18.1 ; P27.1 v1(4805,835) ; v1(4830,6640) P11.1 ; v1(5165,3615) P59.1 ; v1(5175,4830) P51.1
  other v1: 3240,850 2940,3625
SIG2_OUT_1: P1_2.1 P12.1 P21.1 P28.1 P36.1 P44.1 P52.1 P60.1 P68.1 U1_2.2 | length 11617.9
  SIGPour w20: P36.1 v1(2475,3745) ; P44.1 2465,4680 cw(c2465,4675) v1@2470,4675 ; P68.1 v1@3375,650 ; 3430,7015 P21.1 ; P28.1 v1@4680,650 ; v1(4710,7025) P12.1 ; v1(5540,3740) P60.1 ; v1(5555,4695) P52.1
  other v1: 3375,655 4680,655 2470,4680
SIG3_OUT_1: P1_3.1 P13.1 P20.1 P29.1 P37.1 P45.1 P53.1 P61.1 P69.1 U1_3.2 | length 8789.6
  SIGPour w20: P37.1 v1@2035,3870 ; P45.1 v1(2025,4560) ; P69.1 v1@3505,450 ; v1(3560,7330.39) P20.1 ; P29.1 v1@4550,455 ; v1@4585,7330 P13.1 ; v1(6010,3865) P61.1 ; v1(6020,4570) P53.1
  other v1: 3505,455 4550,460 2040,3870 4585,7325
SIG4_OUT_1: P1_4.1 P5.1 P19.1 P30.1 P38.1 P46.1 P54.1 P62.1 P70.1 U1_4.2 | length 6148.6
  SIGPour w20: P46.1 v1@1605,4440 ; P38.1 v1(1600,3995) ; P70.1 v1@3660,280 ; v1(3685,7645) 3685,7790 cw(c3690,7790) P19.1 ; P30.1 v1@4420,290 ; v1@4460,7650 ccw(c4460,7655) 4465,7655 P5.1 ; v1(6420,3995) P62.1 ; v1@6440,4445 ccw(c6445,4445) v1(6445,4440) P54.1
  other v1: 3660,285 4420,295 1610,4440 4460,7645
pads on no net: U2.2 U2.6 U2.8 U2.9 U2.10 U2.11
copper on no net:
  other v1: 6965,2560 590,2585 6990,2950 595,2975 815,6065 6980,6435 1005,6480 6980,6835 1005,6875

## Polygon pours and split planes (outlines as drawn)
SIG1_OUT_1 on SIGPour "SIG1_OUT_1_L02_P000" (solid, pour order 0): 2750,6860 cw(c2770,6860) 2770,6880 5415,6880 ccw(c5415,6875) 5410,6875 5410,745 ccw(c5400,745) 5400,755 2755,755 cw(c2755,760) 2750,760
SIG2_OUT_1 on SIGPour "SIG2_OUT_1_L02_P001" (solid, pour order 1): 2280.11,7170 5800,7170 5800,6935 ccw(c5795,6935) 5795,6940 2275,6940
SIG4_OUT_1 on SIGPour "SIG4_OUT_1_L02_P011" (solid, pour order 11): 1410,7565 1720,7565 1720,225 1420,225
SIG3_OUT_1 on SIGPour "SIG3_OUT_1_L02_P007" (solid, pour order 7): 1815,7215 2210,7215 2210,490 ccw(c2200,490) 2200,500 1820,500 cw(c1820,505) 1815,505
SIG3_OUT_1 on SIGPour "SIG3_OUT_1_L02_P006" (solid, pour order 6): 5865,7240 cw(c5865,7235) 5870,7235 5870,500 6213.54,500 6213.54,7238.54
SIG4_OUT_1 on SIGPour "SIG4_OUT_1_L02_P010" (solid, pour order 10): 6315,7565 6655.99,7565 ccw(c6655.99,7564.01) 6655,7564.01 6655,225 6335,225
SIG4_OUT_1 on SIGPour "SIG4_OUT_1_L02_P009" (solid, pour order 9): 1410,7710 6650,7710 cw(c6650,7700) 6660,7700 6660,7570 cw(c6655,7570) 6655,7565 1410,7565
SIG2_OUT_1 on SIGPour "SIG2_OUT_1_L02_P003" (solid, pour order 3): 2655,6945 2655,705 2275,705 cw(c2275,710) 2270,710 2270,6938.5 cw(c2275.08,6938.5) 2275.08,6943.57
SIG3_OUT_1 on SIGPour "SIG3_OUT_1_L02_P008" (solid, pour order 8): 1819.01,525 1819.01,360.99 ccw(c1820,360.99) 1820,360 6210,360 6210,496.46 cw(c6213.54,496.46) 6213.54,500 1820,500
SIG2_OUT_1 on SIGPour "SIG2_OUT_1_L02_P002" (solid, pour order 2): 5470.02,6940 cw(c5470,6935) 5475,6935 5475,705 cw(c5480,705) 5480,710 5775,710 ccw(c5775,733.54) 5798.54,733.54 5798.54,6938.54
SIG4_OUT_1 on SIGPour "SIG4_OUT_1_L02_P013" (solid, pour order 13): 1715,335 ccw(c1722.5,342.87) 1730,335 6345,335 ccw(c6345,330) 6340,330 6340,240 cw(c6335,240) 6335,235 1715,235
SIG3_OUT_1 on SIGPour "SIG3_OUT_1_L02_P005" (solid, pour order 5): 1810,7520 ccw(c1815,7520) 1815,7515 6215,7515 6215,7235 ccw(c6210,7235) 6210,7240 1815,7240
SIG2_OUT_1 on SIGPour "SIG2_OUT_1_L02_P004" (solid, pour order 4): 2270,705 5800,705 5800,550 2270,550
5V_OUT_1 on VOLTPour "5V_OUT_1_L03_P021" (solid, pour order 21): 1455,7675 ccw(c1510,7725) 1560,7670 6540,7670 6540,7390 ccw(c6532.5,7382.5) 6525,7390 1455,7390
5V_OUT_1 on VOLTPour "5V_OUT_1_L03_P023" (solid, pour order 23): 1455,7390 1890,7390 1890,280.05 1470,280.05
5V_OUT_1 on VOLTPour "5V_OUT_1_L03_P022" (solid, pour order 22): 6555,7390 6930,7390 ccw(c6930,7400) 6940,7400 6940,280 6555,280
5V_OUT_1 on VOLTPour "5V_OUT_1_L03_P024" (solid, pour order 24): 1982.45,415.05 6170.1,415.05 6170.1,280.05 ccw(c6168.82,278.78) 6167.55,280.05 1987.45,280.05
28V_OUT_1 on VOLTPour "28V_OUT_1_L03_P015" (solid, pour order 15): 2505,6975 5520,6975 ccw(c5520,6990) 5535,6990 5535,690 cw(c5525,690) 5525,680 2505,680 ccw(c2505,675) 2500,675
10V_OUT_1 on VOLTPour "10V_OUT_1_L03_P019" (solid, pour order 19): 2405,620.5 5615,620.5 ccw(c5615,625.5) 5620,625.5 5620,464.5 ccw(c5629.01,464.5) 5629.01,455.5 2405,455.5
10V_OUT_1 on VOLTPour "10V_OUT_1_L03_P018" (solid, pour order 18): 2088.68,7150 2400.98,7150 cw(c2400.98,7145) 2405.98,7145 2405.98,470.5 cw(c2390.48,470.5) 2390.48,455 2085.98,455
10V_OUT_1 on VOLTPour "10V_OUT_1_L03_P017" (solid, pour order 17): 5620,7135 5957.7,7135 5957.7,467.7 cw(c5945,467.7) 5945,455 5625,455 cw(c5625,460) 5620,460
10V_OUT_1 on VOLTPour "10V_OUT_1_L03_P016" (solid, pour order 16): 2087.7,7305 cw(c2092.7,7305) 2092.7,7310 5957.7,7310 5957.7,7135 2087.7,7135

## Other copper
Multi-Layer:
  the board outline again, w10

## Text inside footprints (layer, text, board x,y; h text height)
D1_1: Top Overlay "*" at 7296,1951 h20; Mechanical 13 "*" at 7321.5,1965 h50
D1_2: Top Overlay "*" at 7261,6026 h20; Mechanical 13 "*" at 7286.5,6040 h50
D1_3: Top Overlay "*" at 614,2014 h20 r180; Mechanical 13 "*" at 588.5,2000 h50 r180
D1_4: Top Overlay "*" at 1014,6104 h20 r180; Mechanical 13 "*" at 988.5,6090 h50 r180
U1_1: Top Overlay "*" at 8112.92,118.37 h50 r90; Mechanical 13 "*" at 8142.94,189.86 h50 r90
U1_2: Top Overlay "*" at 7192.08,6845.75 h50 r270; Mechanical 13 "*" at 7162.06,6774.26 h50 r270
U1_3: Top Overlay "*" at 8112.92,1538.37 h50 r90; Mechanical 13 "*" at 8142.94,1609.86 h50 r90
U1_4: Top Overlay "*" at 1217.08,6895.75 h50 r270; Mechanical 13 "*" at 1187.06,6824.26 h50 r270